# EAGLE board UCirKit30x20-0721 (EAGLE 6.5.0)

Size 73.64 x 100 mm. Coordinates in mm from the lower left corner, seen from the top.
Outline: 0,0 73.64,0 73.64,100 0,100 0,0
Copper layers (1*2*15*16): Top 0.035mm / dielectric 0.2mm / Route2 0.0175mm / dielectric 0.3mm / Route15 0.0175mm / dielectric 0.2mm / Bottom 0.035mm
Design rules "SeeedStudio_4layer_DRU_no_angle_20140221": minimum track width 8mil, minimum drill 12mil, track to track 8mil, track to pad 8mil, pad to pad 8mil, via to via 8mil, smd to smd 0mil, copper to edge 10mil, drill to drill 8mil, minimum pad ring 6mil, minimum via ring 4mil, stop-mask expansion 4mil, vias tented up to drill 100mil, thermal gap 10mil

## Footprints (pad centres in the part's own frame; a part is rotated, then mirrored left to right if it is on the bottom)
1X15 = drill 1.016 pad 1.88: 1 0,0; 2 2.54,0; 3 5.08,0; 4 7.62,0; 5 10.16,0; 6 12.7,0; 7 15.24,0; 8 17.78,0; 9 20.32,0; 10 22.86,0; 11 25.4,0; 12 27.94,0; 13 30.48,0; 14 33.02,0; 15 35.56,0
1X05-1.27MM = drill 0.508 pad 1: 1 0,0; 2 1.27,0; 3 2.54,0; 4 3.81,0; 5 5.08,0

## Placement (x,y rotation side)
JP1  [1X15]  12.7,86.36 270 top
JP2  [1X15]  15.24,86.36 270 top
JP3  [1X15]  17.78,86.36 270 top
JP4  [1X15]  20.32,86.36 270 top
JP5  [1X15]  22.86,86.36 270 top
JP6  [1X15]  25.4,86.36 270 top
JP7  [1X15]  27.94,86.36 270 top
JP8  [1X15]  30.48,86.36 270 top
JP9  [1X15]  33.02,86.36 270 top
JP10  [1X15]  35.56,86.36 270 top
JP11  [1X15]  38.1,86.36 270 top
JP12  [1X15]  40.64,86.36 270 top
JP13  [1X15]  43.18,86.36 270 top
JP14  [1X15]  45.72,86.36 270 top
JP15  [1X15]  48.26,86.36 270 top
JP16  [1X15]  50.8,86.36 270 top
JP17  [1X15]  53.34,86.36 270 top
JP18  [1X15]  55.88,86.36 270 top
JP19  [1X15]  58.42,86.36 270 top
JP20  [1X15]  60.96,86.36 270 top
JP21  [1X15]  12.7,48.26 270 top
JP22  [1X15]  15.24,48.26 270 top
JP23  [1X15]  17.78,48.26 270 top
JP24  [1X15]  20.32,48.26 270 top
JP25  [1X15]  22.86,48.26 270 top
JP26  [1X15]  25.4,48.26 270 top
JP27  [1X15]  27.94,48.26 270 top
JP28  [1X15]  30.48,48.26 270 top
JP29  [1X15]  33.02,48.26 270 top
JP30  [1X15]  35.56,48.26 270 top
JP31  [1X15]  38.1,48.26 270 top
JP32  [1X15]  40.64,48.26 270 top
JP33  [1X15]  43.18,48.26 270 top
JP34  [1X15]  45.72,48.26 270 top
JP35  [1X15]  48.26,48.26 270 top
JP36  [1X15]  50.8,48.26 270 top
JP37  [1X15]  53.34,48.26 270 top
JP38  [1X15]  55.88,48.26 270 top
JP39  [1X15]  58.42,48.26 270 top
JP40  [1X15]  60.96,48.26 270 top
JP42  [1X05-1.27MM]  67.31,17.14 270 top
JP43  [1X05-1.27MM]  56.52,90.81 0 top
JP44  [1X05-1.27MM]  10.16,87 270 top
JP45  [1X05-1.27MM]  10.16,80.64 270 top
JP46  [1X05-1.27MM]  10.16,74.3 270 top
JP47  [1X05-1.27MM]  10.16,67.94 270 top
JP48  [1X05-1.27MM]  10.16,61.59 270 top
JP49  [1X05-1.27MM]  10.16,55.24 270 top
JP50  [1X05-1.27MM]  10.16,48.9 270 top
JP51  [1X05-1.27MM]  10.16,42.55 270 top
JP52  [1X05-1.27MM]  10.16,36.2 270 top
JP53  [1X05-1.27MM]  10.16,29.84 270 top
JP54  [1X05-1.27MM]  10.16,23.5 270 top
JP55  [1X05-1.27MM]  10.16,17.14 270 top
JP56  [1X05-1.27MM]  8.26,87 270 top
JP57  [1X05-1.27MM]  8.26,80.64 270 top
JP58  [1X05-1.27MM]  8.26,74.3 270 top
JP59  [1X05-1.27MM]  8.26,67.94 270 top
JP60  [1X05-1.27MM]  8.26,61.59 270 top
JP61  [1X05-1.27MM]  8.26,55.24 270 top
JP62  [1X05-1.27MM]  8.26,48.9 270 top
JP63  [1X05-1.27MM]  8.26,42.55 270 top
JP64  [1X05-1.27MM]  8.26,36.2 270 top
JP65  [1X05-1.27MM]  8.26,29.84 270 top
JP66  [1X05-1.27MM]  8.26,23.5 270 top
JP67  [1X05-1.27MM]  8.26,17.14 270 top
JP68  [1X05-1.27MM]  6.35,87 270 top
JP69  [1X05-1.27MM]  6.35,80.64 270 top
JP70  [1X05-1.27MM]  6.35,74.3 270 top
JP71  [1X05-1.27MM]  6.35,67.94 270 top
JP72  [1X05-1.27MM]  6.35,61.59 270 top
JP73  [1X05-1.27MM]  6.35,55.24 270 top
JP74  [1X05-1.27MM]  6.35,48.9 270 top
JP75  [1X05-1.27MM]  6.35,42.55 270 top
JP76  [1X05-1.27MM]  6.35,36.2 270 top
JP77  [1X05-1.27MM]  6.35,29.84 270 top
JP78  [1X05-1.27MM]  6.35,23.5 270 top
JP79  [1X05-1.27MM]  6.35,17.14 270 top
JP80  [1X05-1.27MM]  63.5,87 270 top
JP81  [1X05-1.27MM]  63.5,80.64 270 top
JP82  [1X05-1.27MM]  63.5,74.3 270 top
JP83  [1X05-1.27MM]  63.5,67.94 270 top
JP84  [1X05-1.27MM]  63.5,61.59 270 top
JP85  [1X05-1.27MM]  63.5,55.24 270 top
JP86  [1X05-1.27MM]  63.5,48.9 270 top
JP87  [1X05-1.27MM]  63.5,42.55 270 top
JP88  [1X05-1.27MM]  63.5,36.2 270 top
JP89  [1X05-1.27MM]  63.5,29.84 270 top
JP90  [1X05-1.27MM]  63.5,23.5 270 top
JP91  [1X05-1.27MM]  63.5,17.14 270 top
JP92  [1X05-1.27MM]  65.41,17.14 270 top
JP93  [1X05-1.27MM]  65.41,87 270 top
JP94  [1X05-1.27MM]  65.41,80.64 270 top
JP95  [1X05-1.27MM]  65.41,74.3 270 top
JP96  [1X05-1.27MM]  65.41,67.94 270 top
JP97  [1X05-1.27MM]  65.41,61.59 270 top
JP98  [1X05-1.27MM]  65.41,55.24 270 top
JP99  [1X05-1.27MM]  65.41,48.9 270 top
JP100  [1X05-1.27MM]  65.41,42.55 270 top
JP101  [1X05-1.27MM]  65.41,36.2 270 top
JP102  [1X05-1.27MM]  65.41,29.84 270 top
JP103  [1X05-1.27MM]  65.41,23.5 270 top
JP104  [1X05-1.27MM]  67.31,87 270 top
JP105  [1X05-1.27MM]  67.31,80.64 270 top
JP106  [1X05-1.27MM]  67.31,74.3 270 top
JP107  [1X05-1.27MM]  67.31,67.94 270 top
JP108  [1X05-1.27MM]  67.31,61.59 270 top
JP109  [1X05-1.27MM]  67.31,55.24 270 top
JP110  [1X05-1.27MM]  67.31,48.9 270 top
JP111  [1X05-1.27MM]  67.31,42.55 270 top
JP112  [1X05-1.27MM]  67.31,36.2 270 top
JP113  [1X05-1.27MM]  67.31,29.84 270 top
JP114  [1X05-1.27MM]  67.31,23.5 270 top
JP115  [1X05-1.27MM]  31.11,88.9 0 top
JP116  [1X05-1.27MM]  12.06,88.9 0 top
JP117  [1X05-1.27MM]  18.41,88.9 0 top
JP118  [1X05-1.27MM]  24.77,88.9 0 top
JP119  [1X05-1.27MM]  37.47,88.9 0 top
JP120  [1X05-1.27MM]  43.81,88.9 0 top
JP121  [1X05-1.27MM]  50.16,88.9 0 top
JP122  [1X05-1.27MM]  56.52,88.9 0 top
JP123  [1X05-1.27MM]  12.06,90.81 0 top
JP124  [1X05-1.27MM]  18.41,90.81 0 top
JP125  [1X05-1.27MM]  24.77,90.81 0 top
JP126  [1X05-1.27MM]  31.11,90.81 0 top
JP127  [1X05-1.27MM]  37.47,90.81 0 top
JP128  [1X05-1.27MM]  43.81,90.81 0 top
JP129  [1X05-1.27MM]  50.16,90.81 0 top
JP130  [1X05-1.27MM]  12.06,92.71 0 top
JP131  [1X05-1.27MM]  18.41,92.71 0 top
JP132  [1X05-1.27MM]  24.77,92.71 0 top
JP133  [1X05-1.27MM]  31.11,92.71 0 top
JP134  [1X05-1.27MM]  37.47,92.71 0 top
JP135  [1X05-1.27MM]  43.81,92.71 0 top
JP136  [1X05-1.27MM]  50.16,92.71 0 top
JP137  [1X05-1.27MM]  12.06,10.16 0 top
JP138  [1X05-1.27MM]  18.41,10.16 0 top
JP139  [1X05-1.27MM]  56.52,92.71 0 top
JP140  [1X05-1.27MM]  24.77,10.16 0 top
JP141  [1X05-1.27MM]  31.11,10.16 0 top
JP142  [1X05-1.27MM]  37.47,10.16 0 top
JP143  [1X05-1.27MM]  43.81,10.16 0 top
JP144  [1X05-1.27MM]  50.16,10.16 0 top
JP145  [1X05-1.27MM]  56.52,10.16 0 top
JP146  [1X05-1.27MM]  12.06,8.26 0 top
JP147  [1X05-1.27MM]  18.41,8.26 0 top
JP148  [1X05-1.27MM]  24.77,8.26 0 top
JP149  [1X05-1.27MM]  31.11,8.26 0 top
JP150  [1X05-1.27MM]  37.47,8.26 0 top
JP151  [1X05-1.27MM]  43.81,8.26 0 top
JP152  [1X05-1.27MM]  50.16,8.26 0 top
JP153  [1X05-1.27MM]  56.52,8.26 0 top
JP154  [1X05-1.27MM]  12.06,6.35 0 top
JP155  [1X05-1.27MM]  18.41,6.35 0 top
JP156  [1X05-1.27MM]  24.77,6.35 0 top
JP157  [1X05-1.27MM]  31.11,6.35 0 top
JP158  [1X05-1.27MM]  37.47,6.35 0 top
JP159  [1X05-1.27MM]  43.81,6.35 0 top
JP160  [1X05-1.27MM]  50.16,6.35 0 top
JP161  [1X05-1.27MM]  56.52,6.35 0 top

## Library data of the parts
JP1-JP40 JP42-JP161 = SparkFun-Connectors

## Nets
NEW_0: JP1.10 JP42.1
NEW_1: JP1.11 JP42.2
NEW_2: JP1.6 JP42.3
NEW_3: JP1.5 JP42.4
NEW_4: JP1.7 JP42.5
NEW_5: JP6.15 JP80.5
NEW_6: JP11.15 JP85.2
NEW_7: JP1.12 JP113.4
NEW_8: JP12.15 JP83.5
NEW_9: JP1.13 JP113.5
NEW_10: JP2.15 JP88.1
NEW_11: JP3.14 JP88.2
NEW_12: JP1.15 JP88.3
NEW_13: JP2.14 JP88.4
NEW_14: JP3.13 JP88.5
NEW_15: JP7.14 JP87.1
NEW_16: JP7.15 JP87.2
NEW_17: JP8.13 JP87.3
NEW_18: JP8.14 JP87.4
NEW_19: JP3.15 JP87.5
NEW_20: JP8.15 JP86.1
NEW_21: JP9.14 JP86.2
NEW_22: JP9.12 JP86.3
NEW_23: JP9.13 JP86.4
NEW_24: JP10.11 JP86.5
NEW_25: JP1.14 JP91.1
NEW_26: JP2.9 JP91.2
NEW_27: JP2.10 JP91.3
NEW_28: JP2.11 JP91.4
NEW_29: JP2.12 JP91.5
NEW_30: JP2.13 JP90.1
NEW_31: JP3.8 JP90.2
NEW_32: JP3.10 JP90.3
NEW_33: JP3.11 JP90.4
NEW_34: JP3.9 JP90.5
NEW_35: JP4.12 JP89.1
NEW_36: JP4.13 JP89.2
NEW_37: JP4.14 JP89.3
NEW_38: JP4.15 JP89.4
NEW_39: JP5.11 JP89.5
NEW_40: JP9.15 JP94.1
NEW_41: JP10.13 JP94.2
NEW_42: JP12.14 JP94.3
NEW_43: JP13.13 JP94.4
NEW_44: JP13.14 JP94.5
NEW_45: JP10.12 JP93.1
NEW_46: JP10.15 JP93.2
NEW_47: JP10.14 JP93.3
NEW_48: JP11.10 JP93.4
NEW_49: JP11.11 JP93.5
NEW_50: JP3.12 JP92.1
NEW_51: JP4.7 JP92.2
NEW_52: JP4.8 JP92.3
NEW_53: JP1.8 JP92.4
NEW_54: JP1.9 JP92.5
NEW_55: JP14.12 JP97.1
NEW_56: JP14.13 JP97.2
NEW_57: JP14.15 JP97.3
NEW_58: JP14.14 JP97.4
NEW_59: JP15.11 JP97.5
NEW_60: JP15.13 JP96.1
NEW_61: JP15.14 JP96.2
NEW_62: JP15.12 JP96.3
NEW_63: JP15.15 JP96.4
NEW_64: JP16.10 JP96.5
NEW_65: JP16.11 JP95.1
NEW_66: JP16.12 JP95.2
NEW_67: JP16.13 JP95.3
NEW_68: JP16.14 JP95.4
NEW_69: JP16.15 JP95.5
NEW_70: JP11.12 JP100.1
NEW_71: JP11.13 JP100.2
NEW_72: JP12.9 JP100.3
NEW_73: JP5.12 JP100.4
NEW_74: JP5.13 JP100.5
NEW_75: JP11.14 JP99.1
NEW_76: JP12.10 JP99.2
NEW_77: JP12.12 JP99.3
NEW_78: JP12.11 JP99.4
NEW_79: JP12.13 JP99.5
NEW_80: JP17.9 JP98.1
NEW_81: JP17.10 JP98.2
NEW_82: JP17.11 JP98.3
NEW_83: JP13.10 JP98.4
NEW_84: JP13.11 JP98.5
NEW_85: JP4.9 JP103.1
NEW_86: JP4.10 JP103.2
NEW_87: JP4.11 JP103.3
NEW_88: JP5.6 JP103.4
NEW_89: JP5.7 JP103.5
NEW_90: JP5.15 JP102.1
NEW_91: JP5.14 JP102.2
NEW_92: JP6.10 JP102.3
NEW_93: JP5.8 JP102.4
NEW_94: JP5.9 JP102.5
NEW_95: JP6.11 JP101.1
NEW_96: JP6.13 JP101.2
NEW_97: JP6.14 JP101.3
NEW_98: JP6.12 JP101.4
NEW_99: JP7.9 JP101.5
NEW_100: JP17.13 JP106.1
NEW_101: JP17.12 JP106.2
NEW_102: JP17.14 JP106.3
NEW_103: JP17.15 JP106.4
NEW_104: JP18.10 JP106.5
NEW_105: JP13.9 JP105.1
NEW_106: JP18.8 JP105.2
NEW_107: JP18.9 JP105.3
NEW_108: JP18.12 JP105.4
NEW_109: JP18.11 JP105.5
NEW_110: JP13.8 JP104.1
NEW_111: JP13.12 JP104.2
NEW_112: JP14.7 JP104.3
NEW_113: JP14.9 JP104.4
NEW_114: JP14.10 JP104.5
NEW_115: JP18.15 JP109.1
NEW_116: JP14.8 JP109.2
NEW_117: JP14.11 JP109.3
NEW_118: JP15.8 JP109.4
NEW_119: JP15.6 JP109.5
NEW_120: JP18.13 JP108.1
NEW_121: JP18.14 JP108.2
NEW_122: JP19.7 JP108.3
NEW_123: JP19.8 JP108.4
NEW_124: JP19.9 JP108.5
NEW_125: JP19.10 JP107.1
NEW_126: JP19.11 JP107.2
NEW_127: JP19.12 JP107.3
NEW_128: JP19.13 JP107.4
NEW_129: JP19.14 JP107.5
NEW_130: JP7.12 JP112.1
NEW_131: JP7.10 JP112.2
NEW_132: JP7.11 JP112.3
NEW_133: JP7.13 JP112.4
NEW_134: JP8.8 JP112.5
NEW_135: JP15.7 JP111.1
NEW_136: JP8.9 JP111.2
NEW_137: JP8.10 JP111.3
NEW_138: JP8.11 JP111.4
NEW_139: JP8.12 JP111.5
NEW_140: JP15.9 JP110.1
NEW_141: JP15.10 JP110.2
NEW_142: JP16.5 JP110.3
NEW_143: JP16.6 JP110.4
NEW_144: JP16.7 JP110.5
NEW_145: JP5.10 JP114.1
NEW_146: JP6.5 JP114.2
NEW_147: JP6.6 JP114.3
NEW_148: JP6.7 JP114.4
NEW_149: JP6.8 JP114.5
NEW_150: JP9.7 JP113.1
NEW_151: JP9.8 JP113.2
NEW_152: JP6.9 JP113.3
NEW_153: JP16.8 JP80.1
NEW_154: JP16.9 JP80.2
NEW_155: JP17.4 JP80.3
NEW_156: JP17.5 JP80.4
NEW_157: JP17.6 JP81.1
NEW_158: JP17.7 JP81.2
NEW_159: JP17.8 JP81.3
NEW_160: JP18.4 JP81.4
NEW_161: JP19.15 JP81.5
NEW_162: JP20.6 JP82.1
NEW_163: JP20.7 JP82.2
NEW_164: JP20.8 JP82.3
NEW_165: JP20.10 JP82.4
NEW_166: JP20.9 JP82.5
NEW_167: JP20.11 JP83.1
NEW_168: JP20.12 JP83.2
NEW_169: JP20.13 JP83.3
NEW_170: JP20.14 JP83.4
NEW_171: JP21.12 JP84.1
NEW_172: JP21.10 JP84.2
NEW_173: JP20.15 JP84.3
NEW_174: JP21.11 JP84.4
NEW_175: JP21.14 JP84.5
NEW_176: JP21.13 JP85.1
NEW_177: JP22.9 JP85.3
NEW_178: JP22.10 JP85.4
NEW_179: JP18.5 JP85.5
NEW_180: JP2.4 JP46.1
NEW_181: JP2.5 JP46.2
NEW_182: JP2.6 JP46.3
NEW_183: JP2.8 JP46.4
NEW_184: JP2.7 JP46.5
NEW_185: JP45.1
NEW_186: JP1.2 JP45.2
NEW_187: JP1.3 JP45.3
NEW_188: JP1.4 JP45.4
NEW_189: JP2.1 JP45.5
NEW_190: JP2.2 JP44.1
NEW_191: JP3.1 JP44.2
NEW_192: JP2.3 JP44.3
NEW_193: JP3.2 JP44.4
NEW_194: JP4.1 JP44.5
NEW_195: JP7.4 JP49.1
NEW_196: JP7.7 JP49.2
NEW_197: JP7.6 JP49.3
NEW_198: JP7.5 JP49.4
NEW_199: JP7.8 JP49.5
NEW_200: JP8.3 JP48.1
NEW_201: JP8.4 JP48.2
NEW_202: JP8.5 JP48.3
NEW_203: JP8.7 JP48.4
NEW_204: JP8.6 JP48.5
NEW_205: JP3.3 JP47.1
NEW_206: JP3.5 JP47.2
NEW_207: JP3.4 JP47.3
NEW_208: JP3.6 JP47.4
NEW_209: JP3.7 JP47.5
NEW_210: JP9.9 JP52.1
NEW_211: JP18.3 JP52.2
NEW_212: JP18.6 JP52.3
NEW_213: JP18.7 JP52.4
NEW_214: JP19.2 JP52.5
NEW_215: JP9.10 JP51.1
NEW_216: JP9.11 JP51.2
NEW_217: JP10.6 JP51.3
NEW_218: JP10.7 JP51.4
NEW_219: JP10.8 JP51.5
NEW_220: JP10.9 JP50.1
NEW_221: JP10.10 JP50.2
NEW_222: JP11.5 JP50.3
NEW_223: JP11.6 JP50.4
NEW_224: JP11.7 JP50.5
NEW_225: JP21.15 JP55.1
NEW_226: JP22.12 JP55.2
NEW_227: JP22.11 JP55.3
NEW_228: JP22.13 JP55.4
NEW_229: JP22.14 JP55.5
NEW_230: JP19.3 JP54.1
NEW_231: JP23.8 JP54.2
NEW_232: JP23.9 JP54.3
NEW_233: JP22.15 JP54.4
NEW_234: JP23.10 JP54.5
NEW_235: JP19.4 JP53.1
NEW_236: JP19.5 JP53.2
NEW_237: JP19.6 JP53.3
NEW_238: JP20.3 JP53.4
NEW_239: JP20.4 JP53.5
NEW_240: JP9.1 JP58.1
NEW_241: JP4.2 JP58.2
NEW_242: JP4.3 JP58.3
NEW_243: JP4.4 JP58.4
NEW_244: JP4.6 JP58.5
NEW_245: JP6.1 JP57.1
NEW_246: JP7.1 JP57.2
NEW_247: JP8.1 JP57.3
NEW_248: JP7.2 JP57.4
NEW_249: JP8.2 JP57.5
NEW_250: JP7.3 JP56.1
NEW_251: JP5.1 JP56.2
NEW_252: JP5.2 JP56.3
NEW_253: JP6.3 JP56.4
NEW_254: JP6.4 JP56.5
NEW_255: JP9.2 JP61.1
NEW_256: JP9.3 JP61.2
NEW_257: JP9.5 JP61.3
NEW_258: JP9.6 JP61.4
NEW_259: JP9.4 JP61.5
NEW_260: JP4.5 JP60.1
NEW_261: JP5.3 JP60.2
NEW_262: JP10.1 JP60.3
NEW_263: JP10.2 JP60.4
NEW_264: JP10.3 JP60.5
NEW_265: JP5.5 JP59.1
NEW_266: JP5.4 JP59.2
NEW_267: JP6.2 JP59.3
NEW_268: JP37.1 JP59.4
NEW_269: JP36.1 JP59.5
NEW_270: JP11.8 JP64.1
NEW_271: JP11.9 JP64.2
NEW_272: JP20.1 JP64.3
NEW_273: JP20.2 JP64.4
NEW_274: JP21.5 JP64.5
NEW_275: JP12.4 JP63.1
NEW_276: JP12.5 JP63.2
NEW_277: JP12.7 JP63.3
NEW_278: JP12.8 JP63.4
NEW_279: JP12.6 JP63.5
NEW_280: JP10.4 JP62.1
NEW_281: JP10.5 JP62.2
NEW_282: JP13.3 JP62.3
NEW_283: JP13.4 JP62.4
NEW_284: JP13.5 JP62.5
NEW_285: JP23.12 JP67.1
NEW_286: JP23.13 JP67.2
NEW_287: JP23.11 JP67.3
NEW_288: JP23.14 JP67.4
NEW_289: JP23.15 JP67.5
NEW_290: JP20.5 JP66.1
NEW_291: JP21.7 JP66.2
NEW_292: JP24.7 JP66.3
NEW_293: JP24.8 JP66.4
NEW_294: JP24.9 JP66.5
NEW_295: JP21.6 JP65.1
NEW_296: JP21.9 JP65.2
NEW_297: JP21.8 JP65.3
NEW_298: JP22.4 JP65.4
NEW_299: JP22.5 JP65.5
NEW_300: JP40.2 JP70.1
NEW_301: JP39.3 JP70.2
NEW_302: JP38.4 JP70.3
NEW_303: JP40.1 JP70.4
NEW_304: JP39.1 JP70.5
NEW_305: JP40.4 JP69.1
NEW_306: JP39.5 JP69.2
NEW_307: JP38.6 JP69.3
NEW_308: JP40.3 JP69.4
NEW_309: JP39.4 JP69.5
NEW_310: JP40.7 JP68.1
NEW_311: JP39.8 JP68.2
NEW_312: JP38.9 JP68.3
NEW_313: JP40.6 JP68.4
NEW_314: JP40.5 JP68.5
NEW_315: JP11.1 JP73.1
NEW_316: JP11.2 JP73.2
NEW_317: JP11.3 JP73.3
NEW_318: JP11.4 JP73.4
NEW_319: JP12.2 JP73.5
NEW_320: JP35.2 JP72.1
NEW_321: JP34.3 JP72.2
NEW_322: JP35.1 JP72.3
NEW_323: JP12.1 JP72.4
NEW_324: JP13.1 JP72.5
NEW_325: JP38.1 JP71.1
NEW_326: JP37.2 JP71.2
NEW_327: JP36.3 JP71.3
NEW_328: JP36.2 JP71.4
NEW_329: JP35.3 JP71.5
NEW_330: JP13.6 JP74.5
NEW_331: JP22.7 JP77.5
NEW_332: JP12.3 JP74.1
NEW_333: JP13.2 JP74.2
NEW_334: JP14.1 JP74.3
NEW_335: JP14.2 JP74.4
NEW_336: JP14.3 JP75.1
NEW_337: JP13.7 JP75.2
NEW_338: JP14.4 JP75.3
NEW_339: JP14.5 JP75.4
NEW_340: JP14.6 JP75.5
NEW_341: JP15.1 JP76.1
NEW_342: JP15.2 JP76.2
NEW_343: JP15.3 JP76.3
NEW_344: JP15.4 JP76.4
NEW_345: JP22.6 JP76.5
NEW_346: JP23.3 JP77.1
NEW_347: JP22.8 JP77.2
NEW_348: JP23.4 JP77.3
NEW_349: JP23.5 JP77.4
NEW_350: JP23.6 JP78.1
NEW_351: JP23.7 JP78.2
NEW_352: JP24.4 JP78.3
NEW_353: JP24.3 JP78.4
NEW_354: JP24.10 JP78.5
NEW_355: JP24.14 JP79.1
NEW_356: JP24.11 JP79.2
NEW_357: JP24.12 JP79.3
NEW_358: JP24.13 JP79.4
NEW_359: JP25.6 JP79.5
NEW_360: JP15.5 JP43.1
NEW_361: JP16.1 JP43.2
NEW_362: JP16.2 JP43.3
NEW_363: JP16.3 JP43.4
NEW_364: JP16.4 JP43.5
NEW_365: JP34.4 JP115.1
NEW_366: JP33.5 JP115.2
NEW_367: JP34.1 JP115.3
NEW_368: JP33.4 JP115.4
NEW_369: JP34.2 JP115.5
NEW_370: JP39.2 JP118.1
NEW_371: JP38.2 JP118.2
NEW_372: JP35.4 JP118.3
NEW_373: JP34.5 JP118.4
NEW_374: JP33.6 JP118.5
NEW_375: JP38.5 JP117.1
NEW_376: JP37.6 JP117.2
NEW_377: JP37.5 JP117.3
NEW_378: JP36.6 JP117.4
NEW_379: JP35.7 JP117.5
NEW_380: JP39.7 JP116.1
NEW_381: JP39.6 JP116.2
NEW_382: JP37.7 JP116.3
NEW_383: JP36.8 JP116.4
NEW_384: JP35.9 JP116.5
NEW_385: JP17.1 JP121.1
NEW_386: JP17.2 JP121.2
NEW_387: JP17.3 JP121.3
NEW_388: JP18.1 JP121.4
NEW_389: JP18.2 JP121.5
NEW_390: JP37.15 JP120.1
NEW_391: JP21.3 JP120.2
NEW_392: JP22.2 JP120.3
NEW_393: JP19.1 JP120.4
NEW_394: JP38.14 JP120.5
NEW_395: JP36.15 JP119.1
NEW_396: JP38.15 JP119.2
NEW_397: JP39.13 JP119.3
NEW_398: JP21.1 JP119.4
NEW_399: JP21.2 JP119.5
NEW_400: JP34.10 JP124.1
NEW_401: JP36.7 JP124.2
NEW_402: JP35.8 JP124.3
NEW_403: JP34.9 JP124.4
NEW_404: JP34.8 JP124.5
NEW_405: JP37.10 JP123.1
NEW_406: JP38.8 JP123.2
NEW_407: JP38.7 JP123.3
NEW_408: JP37.8 JP123.4
NEW_409: JP33.11 JP123.5
NEW_410: JP21.4 JP122.1
NEW_411: JP22.1 JP122.2
NEW_412: JP22.3 JP122.3
NEW_413: JP23.1 JP122.4
NEW_414: JP23.2 JP122.5
NEW_415: JP33.3 JP127.1
NEW_416: JP32.4 JP127.2
NEW_417: JP37.14 JP127.3
NEW_418: JP38.13 JP127.4
NEW_419: JP35.15 JP127.5
NEW_420: JP32.7 JP126.1
NEW_421: JP33.1 JP126.2
NEW_422: JP32.6 JP126.3
NEW_423: JP32.2 JP126.4
NEW_424: JP33.2 JP126.5
NEW_425: JP33.9 JP125.1
NEW_426: JP38.3 JP125.2
NEW_427: JP37.4 JP125.3
NEW_428: JP37.3 JP125.4
NEW_429: JP32.1 JP125.5
NEW_430: JP36.11 JP130.1
NEW_431: JP35.12 JP130.2
NEW_432: JP34.13 JP130.3
NEW_433: JP37.9 JP130.4
NEW_434: JP36.9 JP130.5
NEW_435: JP24.1 JP129.1
NEW_436: JP32.15 JP129.2
NEW_437: JP33.14 JP129.3
NEW_438: JP33.15 JP129.4
NEW_439: JP34.14 JP129.5
NEW_440: JP34.15 JP128.1
NEW_441: JP35.14 JP128.2
NEW_442: JP39.14 JP128.3
NEW_443: JP35.13 JP128.4
NEW_444: JP39.15 JP128.5
NEW_445: JP31.8 JP133.1
NEW_446: JP31.2 JP133.2
NEW_447: JP30.9 JP133.3
NEW_448: JP31.7 JP133.4
NEW_449: JP31.3 JP133.5
NEW_450: JP32.10 JP132.1
NEW_451: JP31.11 JP132.2
NEW_452: JP30.12 JP132.3
NEW_453: JP36.5 JP132.4
NEW_454: JP36.4 JP132.5
NEW_455: JP32.12 JP131.1
NEW_456: JP31.13 JP131.2
NEW_457: JP30.14 JP131.3
NEW_458: JP33.10 JP131.4
NEW_459: JP32.11 JP131.5
NEW_460: JP36.12 JP136.1
NEW_461: JP40.12 JP136.2
NEW_462: JP40.13 JP136.3
NEW_463: JP36.13 JP136.4
NEW_464: JP36.14 JP136.5
NEW_465: JP40.14 JP135.1
NEW_466: JP37.12 JP135.2
NEW_467: JP38.11 JP135.3
NEW_468: JP40.15 JP135.4
NEW_469: JP37.11 JP135.5
NEW_470: JP32.5 JP134.1
NEW_471: JP32.3 JP134.2
NEW_472: JP31.5 JP134.3
NEW_473: JP39.12 JP134.4
NEW_474: JP40.11 JP134.5
NEW_475: JP37.13 JP139.1
NEW_476: JP38.10 JP139.2
NEW_477: JP38.12 JP139.3
NEW_478: JP39.9 JP139.4
NEW_479: JP39.10 JP139.5
NEW_480: JP40.9 JP161.1
NEW_481: JP40.10 JP161.2
NEW_482: JP30.6 JP161.3
NEW_483: JP31.6 JP161.4
NEW_484: JP31.4 JP161.5
NEW_485: JP24.15 JP138.1
NEW_486: JP25.3 JP138.2
NEW_487: JP24.2 JP138.3
NEW_488: JP25.1 JP138.4
NEW_489: JP24.5 JP138.5
NEW_490: JP24.6 JP137.1
NEW_491: JP25.5 JP137.2
NEW_492: JP25.4 JP137.3
NEW_493: JP25.7 JP137.4
NEW_494: JP25.8 JP137.5
NEW_495: JP39.11 JP142.1
NEW_496: JP40.8 JP142.2
NEW_497: JP30.8 JP142.3
NEW_498: JP30.4 JP142.4
NEW_499: JP29.9 JP142.5
NEW_500: JP25.2 JP141.1
NEW_501: JP25.14 JP141.2
NEW_502: JP25.15 JP141.3
NEW_503: JP26.1 JP141.4
NEW_504: JP29.7 JP141.5
NEW_505: JP25.11 JP140.1
NEW_506: JP25.10 JP140.2
NEW_507: JP26.2 JP140.3
NEW_508: JP25.9 JP140.4
NEW_509: JP26.3 JP140.5
NEW_510: JP29.15 JP145.1
NEW_511: JP27.1 JP145.2
NEW_512: JP35.10 JP145.3
NEW_513: JP34.11 JP145.4
NEW_514: JP36.10 JP145.5
NEW_515: JP29.13 JP144.1
NEW_516: JP29.1 JP144.2
NEW_517: JP31.12 JP144.3
NEW_518: JP30.13 JP144.4
NEW_519: JP29.14 JP144.5
NEW_520: JP30.3 JP143.1
NEW_521: JP29.10 JP143.2
NEW_522: JP35.5 JP143.3
NEW_523: JP35.6 JP143.4
NEW_524: JP34.7 JP143.5
NEW_525: JP25.13 JP148.1
NEW_526: JP26.4 JP148.2
NEW_527: JP26.8 JP148.3
NEW_528: JP26.7 JP148.4
NEW_529: JP25.12 JP147.1
NEW_530: JP27.2 JP148.5
NEW_531: JP26.5 JP147.2
NEW_532: JP26.6 JP147.3
NEW_533: JP26.9 JP147.4
NEW_534: JP26.10 JP147.5
NEW_535: JP26.11 JP146.1
NEW_536: JP26.12 JP146.2
NEW_537: JP26.13 JP146.3
NEW_538: JP26.14 JP146.4
NEW_539: JP26.15 JP146.5
NEW_540: JP29.4 JP151.1
NEW_541: JP34.6 JP151.2
NEW_542: JP33.8 JP151.3
NEW_543: JP28.14 JP151.4
NEW_544: JP28.2 JP151.5
NEW_545: JP30.7 JP150.1
NEW_546: JP29.5 JP150.2
NEW_547: JP28.10 JP150.3
NEW_548: JP28.11 JP150.4
NEW_549: JP28.5 JP150.5
NEW_550: JP27.3 JP149.1
NEW_551: JP27.4 JP149.2
NEW_552: JP27.14 JP149.3
NEW_553: JP28.8 JP149.4
NEW_554: JP30.5 JP149.5
NEW_555: JP27.5 JP154.1
NEW_556: JP27.6 JP154.2
NEW_557: JP27.7 JP154.3
NEW_558: JP27.8 JP154.4
NEW_559: JP27.9 JP154.5
NEW_560: JP35.11 JP153.1
NEW_561: JP33.12 JP153.2
NEW_562: JP34.12 JP153.3
NEW_563: JP29.8 JP153.4
NEW_564: JP29.6 JP153.5
NEW_565: JP27.15 JP152.1
NEW_566: JP28.15 JP152.2
NEW_567: JP28.1 JP152.3
NEW_568: JP32.13 JP152.4
NEW_569: JP31.14 JP152.5
NEW_570: JP28.3 JP157.1
NEW_571: JP28.9 JP157.2
NEW_572: JP28.7 JP157.3
NEW_573: JP27.10 JP157.4
NEW_574: JP28.6 JP157.5
NEW_575: JP27.11 JP156.1
NEW_576: JP27.12 JP156.2
NEW_577: JP30.15 JP156.3
NEW_578: JP31.15 JP156.4
NEW_579: JP27.13 JP156.5
NEW_580: JP28.4 JP155.1
NEW_581: JP32.14 JP155.2
NEW_582: JP33.13 JP155.3
NEW_583: JP32.9 JP155.4
NEW_584: JP33.7 JP155.5
NEW_585: JP32.8 JP160.1
NEW_586: JP31.10 JP160.2
NEW_587: JP31.9 JP160.3
NEW_588: JP30.11 JP160.4
NEW_589: JP31.1 JP160.5
NEW_590: JP30.1 JP159.1
NEW_591: JP29.12 JP159.2
NEW_592: JP30.10 JP159.3
NEW_593: JP29.2 JP159.4
NEW_594: JP30.2 JP159.5
NEW_595: JP28.13 JP158.1
NEW_596: JP29.11 JP158.2
NEW_597: JP29.3 JP158.3
NEW_598: JP28.12 JP158.4
NEW_599: JP1.1 JP158.5

## Tracks (layer width: path | path; a pad name or v marks a point on that pad's centre or on a via)
NEW_0  (1 unrouted)
NEW_1  (1 unrouted)
NEW_2  (1 unrouted)
NEW_3  (1 unrouted)
NEW_4  (1 unrouted)
NEW_5  (1 unrouted)
NEW_6  (1 unrouted)
NEW_7  (1 unrouted)
NEW_8  (1 unrouted)
NEW_9  (1 unrouted)
NEW_10  (1 unrouted)
NEW_11  (1 unrouted)
NEW_12  (1 unrouted)
NEW_13  (1 unrouted)
NEW_14  (1 unrouted)
NEW_15  (1 unrouted)
NEW_16  (1 unrouted)
NEW_17  (1 unrouted)
NEW_18  (1 unrouted)
NEW_19  (1 unrouted)
NEW_20  (1 unrouted)
NEW_21  (1 unrouted)
NEW_22  (1 unrouted)
NEW_23  (1 unrouted)
NEW_24  (1 unrouted)
NEW_25  (1 unrouted)
NEW_26  (1 unrouted)
NEW_27  (1 unrouted)
NEW_28  (1 unrouted)
NEW_29  (1 unrouted)
NEW_30  (1 unrouted)
NEW_31  (1 unrouted)
NEW_32  (1 unrouted)
NEW_33  (1 unrouted)
NEW_34  (1 unrouted)
NEW_35  (1 unrouted)
NEW_36  (1 unrouted)
NEW_37  (1 unrouted)
NEW_38  (1 unrouted)
NEW_39  (1 unrouted)
NEW_40  (1 unrouted)
NEW_41  (1 unrouted)
NEW_42  (1 unrouted)
NEW_43  (1 unrouted)
NEW_44  (1 unrouted)
NEW_45  (1 unrouted)
NEW_46  (1 unrouted)
NEW_47  (1 unrouted)
NEW_48  (1 unrouted)
NEW_49  (1 unrouted)
NEW_50  (1 unrouted)
NEW_51  (1 unrouted)
NEW_52  (1 unrouted)
NEW_53  (1 unrouted)
NEW_54  (1 unrouted)
NEW_55  (1 unrouted)
NEW_56  (1 unrouted)
NEW_57  (1 unrouted)
NEW_58  (1 unrouted)
NEW_59  (1 unrouted)
NEW_60  (1 unrouted)
NEW_61  (1 unrouted)
NEW_62  (1 unrouted)
NEW_63  (1 unrouted)
NEW_64  (1 unrouted)
NEW_65  (1 unrouted)
NEW_66  (1 unrouted)
NEW_67  (1 unrouted)
NEW_68  (1 unrouted)
NEW_69  (1 unrouted)
NEW_70  (1 unrouted)
NEW_71  (1 unrouted)
NEW_72  (1 unrouted)
NEW_73  (1 unrouted)
NEW_74  (1 unrouted)
NEW_75  (1 unrouted)
NEW_76  (1 unrouted)
NEW_77  (1 unrouted)
NEW_78  (1 unrouted)
NEW_79  (1 unrouted)
NEW_80  (1 unrouted)
NEW_81  (1 unrouted)
NEW_82  (1 unrouted)
NEW_83  (1 unrouted)
NEW_84  (1 unrouted)
NEW_85  (1 unrouted)
NEW_86  (1 unrouted)
NEW_87  (1 unrouted)
NEW_88  (1 unrouted)
NEW_89  (1 unrouted)
NEW_90  (1 unrouted)
NEW_91  (1 unrouted)
NEW_92  (1 unrouted)
NEW_93  (1 unrouted)
NEW_94  (1 unrouted)
NEW_95  (1 unrouted)
NEW_96  (1 unrouted)
NEW_97  (1 unrouted)
NEW_98  (1 unrouted)
NEW_99  (1 unrouted)
NEW_100  (1 unrouted)
NEW_101  (1 unrouted)
NEW_102  (1 unrouted)
NEW_103  (1 unrouted)
NEW_104  (1 unrouted)
NEW_105  (1 unrouted)
NEW_106  (1 unrouted)
NEW_107  (1 unrouted)
NEW_108  (1 unrouted)
NEW_109  (1 unrouted)
NEW_110  (1 unrouted)
NEW_111  (1 unrouted)
NEW_112  (1 unrouted)
NEW_113  (1 unrouted)
NEW_114  (1 unrouted)
NEW_115  (1 unrouted)
NEW_116  (1 unrouted)
NEW_117  (1 unrouted)
NEW_118  (1 unrouted)
NEW_119  (1 unrouted)
NEW_120  (1 unrouted)
NEW_121  (1 unrouted)
NEW_122  (1 unrouted)
NEW_123  (1 unrouted)
NEW_124  (1 unrouted)
NEW_125  (1 unrouted)
NEW_126  (1 unrouted)
NEW_127  (1 unrouted)
NEW_128  (1 unrouted)
NEW_129  (1 unrouted)
NEW_130  (1 unrouted)
NEW_131  (1 unrouted)
NEW_132  (1 unrouted)
NEW_133  (1 unrouted)
NEW_134  (1 unrouted)
NEW_135  (1 unrouted)
NEW_136  (1 unrouted)
NEW_137  (1 unrouted)
NEW_138  (1 unrouted)
NEW_139  (1 unrouted)
NEW_140  (1 unrouted)
NEW_141  (1 unrouted)
NEW_142  (1 unrouted)
NEW_143  (1 unrouted)
NEW_144  (1 unrouted)
NEW_145  (1 unrouted)
NEW_146  (1 unrouted)
NEW_147  (1 unrouted)
NEW_148  (1 unrouted)
NEW_149  (1 unrouted)
NEW_150  (1 unrouted)
NEW_151  (1 unrouted)
NEW_152  (1 unrouted)
NEW_153  (1 unrouted)
NEW_154  (1 unrouted)
NEW_155  (1 unrouted)
NEW_156  (1 unrouted)
NEW_157  (1 unrouted)
NEW_158  (1 unrouted)
NEW_159  (1 unrouted)
NEW_160  (1 unrouted)
NEW_161  (1 unrouted)
NEW_162  (1 unrouted)
NEW_163  (1 unrouted)
NEW_164  (1 unrouted)
NEW_165  (1 unrouted)
NEW_166  (1 unrouted)
NEW_167  (1 unrouted)
NEW_168  (1 unrouted)
NEW_169  (1 unrouted)
NEW_170  (1 unrouted)
NEW_171  (1 unrouted)
NEW_172  (1 unrouted)
NEW_173  (1 unrouted)
NEW_174  (1 unrouted)
NEW_175  (1 unrouted)
NEW_176  (1 unrouted)
NEW_177  (1 unrouted)
NEW_178  (1 unrouted)
NEW_179  (1 unrouted)
NEW_180  (1 unrouted)
NEW_181  (1 unrouted)
NEW_182  (1 unrouted)
NEW_183  (1 unrouted)
NEW_184  (1 unrouted)
NEW_186  (1 unrouted)
NEW_187  (1 unrouted)
NEW_188  (1 unrouted)
NEW_189  (1 unrouted)
NEW_190  (1 unrouted)
NEW_191  (1 unrouted)
NEW_192  (1 unrouted)
NEW_193  (1 unrouted)
NEW_194  (1 unrouted)
NEW_195  (1 unrouted)
NEW_196  (1 unrouted)
NEW_197  (1 unrouted)
NEW_198  (1 unrouted)
NEW_199  (1 unrouted)
NEW_200  (1 unrouted)
NEW_201  (1 unrouted)
NEW_202  (1 unrouted)
NEW_203  (1 unrouted)
NEW_204  (1 unrouted)
NEW_205  (1 unrouted)
NEW_206  (1 unrouted)
NEW_207  (1 unrouted)
NEW_208  (1 unrouted)
NEW_209  (1 unrouted)
NEW_210  (1 unrouted)
NEW_211  (1 unrouted)
NEW_212  (1 unrouted)
NEW_213  (1 unrouted)
NEW_214  (1 unrouted)
NEW_215  (1 unrouted)
NEW_216  (1 unrouted)
NEW_217  (1 unrouted)
NEW_218  (1 unrouted)
NEW_219  (1 unrouted)
NEW_220  (1 unrouted)
NEW_221  (1 unrouted)
NEW_222  (1 unrouted)
NEW_223  (1 unrouted)
NEW_224  (1 unrouted)
NEW_225  (1 unrouted)
NEW_226  (1 unrouted)
NEW_227  (1 unrouted)
NEW_228  (1 unrouted)
NEW_229  (1 unrouted)
NEW_230  (1 unrouted)
NEW_231  (1 unrouted)
NEW_232  (1 unrouted)
NEW_233  (1 unrouted)
NEW_234  (1 unrouted)
NEW_235  (1 unrouted)
NEW_236  (1 unrouted)
NEW_237  (1 unrouted)
NEW_238  (1 unrouted)
NEW_239  (1 unrouted)
NEW_240  (1 unrouted)
NEW_241  (1 unrouted)
NEW_242  (1 unrouted)
NEW_243  (1 unrouted)
NEW_244  (1 unrouted)
NEW_245  (1 unrouted)
NEW_246  (1 unrouted)
NEW_247  (1 unrouted)
NEW_248  (1 unrouted)
NEW_249  (1 unrouted)
NEW_250  (1 unrouted)
NEW_251  (1 unrouted)
NEW_252  (1 unrouted)
NEW_253  (1 unrouted)
NEW_254  (1 unrouted)
NEW_255  (1 unrouted)
NEW_256  (1 unrouted)
NEW_257  (1 unrouted)
NEW_258  (1 unrouted)
NEW_259  (1 unrouted)
NEW_260  (1 unrouted)
NEW_261  (1 unrouted)
NEW_262  (1 unrouted)
NEW_263  (1 unrouted)
NEW_264  (1 unrouted)
NEW_265  (1 unrouted)
NEW_266  (1 unrouted)
NEW_267  (1 unrouted)
NEW_268  (1 unrouted)
NEW_269  (1 unrouted)
NEW_270  (1 unrouted)
NEW_271  (1 unrouted)
NEW_272  (1 unrouted)
NEW_273  (1 unrouted)
NEW_274  (1 unrouted)
NEW_275  (1 unrouted)
NEW_276  (1 unrouted)
NEW_277  (1 unrouted)
NEW_278  (1 unrouted)
NEW_279  (1 unrouted)
NEW_280  (1 unrouted)
NEW_281  (1 unrouted)
NEW_282  (1 unrouted)
NEW_283  (1 unrouted)
NEW_284  (1 unrouted)
NEW_285  (1 unrouted)
NEW_286  (1 unrouted)
NEW_287  (1 unrouted)
NEW_288  (1 unrouted)
NEW_289  (1 unrouted)
NEW_290  (1 unrouted)
NEW_291  (1 unrouted)
NEW_292  (1 unrouted)
NEW_293  (1 unrouted)
NEW_294  (1 unrouted)
NEW_295  (1 unrouted)
NEW_296  (1 unrouted)
NEW_297  (1 unrouted)
NEW_298  (1 unrouted)
NEW_299  (1 unrouted)
NEW_300  (1 unrouted)
NEW_301  (1 unrouted)
NEW_302  (1 unrouted)
NEW_303  (1 unrouted)
NEW_304  (1 unrouted)
NEW_305  (1 unrouted)
NEW_306  (1 unrouted)
NEW_307  (1 unrouted)
NEW_308  (1 unrouted)
NEW_309  (1 unrouted)
NEW_310  (1 unrouted)
NEW_311  (1 unrouted)
NEW_312  (1 unrouted)
NEW_313  (1 unrouted)
NEW_314  (1 unrouted)
NEW_315  (1 unrouted)
NEW_316  (1 unrouted)
NEW_317  (1 unrouted)
NEW_318  (1 unrouted)
NEW_319  (1 unrouted)
NEW_320  (1 unrouted)
NEW_321  (1 unrouted)
NEW_322  (1 unrouted)
NEW_323  (1 unrouted)
NEW_324  (1 unrouted)
NEW_325  (1 unrouted)
NEW_326  (1 unrouted)
NEW_327  (1 unrouted)
NEW_328  (1 unrouted)
NEW_329  (1 unrouted)
NEW_330  (1 unrouted)
NEW_331  (1 unrouted)
NEW_332  (1 unrouted)
NEW_333  (1 unrouted)
NEW_334  (1 unrouted)
NEW_335  (1 unrouted)
NEW_336  (1 unrouted)
NEW_337  (1 unrouted)
NEW_338  (1 unrouted)
NEW_339  (1 unrouted)
NEW_340  (1 unrouted)
NEW_341  (1 unrouted)
NEW_342  (1 unrouted)
NEW_343  (1 unrouted)
NEW_344  (1 unrouted)
NEW_345  (1 unrouted)
NEW_346  (1 unrouted)
NEW_347  (1 unrouted)
NEW_348  (1 unrouted)
NEW_349  (1 unrouted)
NEW_350  (1 unrouted)
NEW_351  (1 unrouted)
NEW_352  (1 unrouted)
NEW_353  (1 unrouted)
NEW_354  (1 unrouted)
NEW_355  (1 unrouted)
NEW_356  (1 unrouted)
NEW_357  (1 unrouted)
NEW_358  (1 unrouted)
NEW_359  (1 unrouted)
NEW_360  (1 unrouted)
NEW_361  (1 unrouted)
NEW_362  (1 unrouted)
NEW_363  (1 unrouted)
NEW_364  (1 unrouted)
NEW_365  (1 unrouted)
NEW_366  (1 unrouted)
NEW_367  (1 unrouted)
NEW_368  (1 unrouted)
NEW_369  (1 unrouted)
NEW_370  (1 unrouted)
NEW_371  (1 unrouted)
NEW_372  (1 unrouted)
NEW_373  (1 unrouted)
NEW_374  (1 unrouted)
NEW_375  (1 unrouted)
NEW_376  (1 unrouted)
NEW_377  (1 unrouted)
NEW_378  (1 unrouted)
NEW_379  (1 unrouted)
NEW_380  (1 unrouted)
NEW_381  (1 unrouted)
NEW_382  (1 unrouted)
NEW_383  (1 unrouted)
NEW_384  (1 unrouted)
NEW_385  (1 unrouted)
NEW_386  (1 unrouted)
NEW_387  (1 unrouted)
NEW_388  (1 unrouted)
NEW_389  (1 unrouted)
NEW_390  (1 unrouted)
NEW_391  (1 unrouted)
NEW_392  (1 unrouted)
NEW_393  (1 unrouted)
NEW_394  (1 unrouted)
NEW_395  (1 unrouted)
NEW_396  (1 unrouted)
NEW_397  (1 unrouted)
NEW_398  (1 unrouted)
NEW_399  (1 unrouted)
NEW_400  (1 unrouted)
NEW_401  (1 unrouted)
NEW_402  (1 unrouted)
NEW_403  (1 unrouted)
NEW_404  (1 unrouted)
NEW_405  (1 unrouted)
NEW_406  (1 unrouted)
NEW_407  (1 unrouted)
NEW_408  (1 unrouted)
NEW_409  (1 unrouted)
NEW_410  (1 unrouted)
NEW_411  (1 unrouted)
NEW_412  (1 unrouted)
NEW_413  (1 unrouted)
NEW_414  (1 unrouted)
NEW_415  (1 unrouted)
NEW_416  (1 unrouted)
NEW_417  (1 unrouted)
NEW_418  (1 unrouted)
NEW_419  (1 unrouted)
NEW_420  (1 unrouted)
NEW_421  (1 unrouted)
NEW_422  (1 unrouted)
NEW_423  (1 unrouted)
NEW_424  (1 unrouted)
NEW_425  (1 unrouted)
NEW_426  (1 unrouted)
NEW_427  (1 unrouted)
NEW_428  (1 unrouted)
NEW_429  (1 unrouted)
NEW_430  (1 unrouted)
NEW_431  (1 unrouted)
NEW_432  (1 unrouted)
NEW_433  (1 unrouted)
NEW_434  (1 unrouted)
NEW_435  (1 unrouted)
NEW_436  (1 unrouted)
NEW_437  (1 unrouted)
NEW_438  (1 unrouted)
NEW_439  (1 unrouted)
NEW_440  (1 unrouted)
NEW_441  (1 unrouted)
NEW_442  (1 unrouted)
NEW_443  (1 unrouted)
NEW_444  (1 unrouted)
NEW_445  (1 unrouted)
NEW_446  (1 unrouted)
NEW_447  (1 unrouted)
NEW_448  (1 unrouted)
NEW_449  (1 unrouted)
NEW_450  (1 unrouted)
NEW_451  (1 unrouted)
NEW_452  (1 unrouted)
NEW_453  (1 unrouted)
NEW_454  (1 unrouted)
NEW_455  (1 unrouted)
NEW_456  (1 unrouted)
NEW_457  (1 unrouted)
NEW_458  (1 unrouted)
NEW_459  (1 unrouted)
NEW_460  (1 unrouted)
NEW_461  (1 unrouted)
NEW_462  (1 unrouted)
NEW_463  (1 unrouted)
NEW_464  (1 unrouted)
NEW_465  (1 unrouted)
NEW_466  (1 unrouted)
NEW_467  (1 unrouted)
NEW_468  (1 unrouted)
NEW_469  (1 unrouted)
NEW_470  (1 unrouted)
NEW_471  (1 unrouted)
NEW_472  (1 unrouted)
NEW_473  (1 unrouted)
NEW_474  (1 unrouted)
NEW_475  (1 unrouted)
NEW_476  (1 unrouted)
NEW_477  (1 unrouted)
NEW_478  (1 unrouted)
NEW_479  (1 unrouted)
NEW_480  (1 unrouted)
NEW_481  (1 unrouted)
NEW_482  (1 unrouted)
NEW_483  (1 unrouted)
NEW_484  (1 unrouted)
NEW_485  (1 unrouted)
NEW_486  (1 unrouted)
NEW_487  (1 unrouted)
NEW_488  (1 unrouted)
NEW_489  (1 unrouted)
NEW_490  (1 unrouted)
NEW_491  (1 unrouted)
NEW_492  (1 unrouted)
NEW_493  (1 unrouted)
NEW_494  (1 unrouted)
NEW_495  (1 unrouted)
NEW_496  (1 unrouted)
NEW_497  (1 unrouted)
NEW_498  (1 unrouted)
NEW_499  (1 unrouted)
NEW_500  (1 unrouted)
NEW_501  (1 unrouted)
NEW_502  (1 unrouted)
NEW_503  (1 unrouted)
NEW_504  (1 unrouted)
NEW_505  (1 unrouted)
NEW_506  (1 unrouted)
NEW_507  (1 unrouted)
NEW_508  (1 unrouted)
NEW_509  (1 unrouted)
NEW_510  (1 unrouted)
NEW_511  (1 unrouted)
NEW_512  (1 unrouted)
NEW_513  (1 unrouted)
NEW_514  (1 unrouted)
NEW_515  (1 unrouted)
NEW_516  (1 unrouted)
NEW_517  (1 unrouted)
NEW_518  (1 unrouted)
NEW_519  (1 unrouted)
NEW_520  (1 unrouted)
NEW_521  (1 unrouted)
NEW_522  (1 unrouted)
NEW_523  (1 unrouted)
NEW_524  (1 unrouted)
NEW_525  (1 unrouted)
NEW_526  (1 unrouted)
NEW_527  (1 unrouted)
NEW_528  (1 unrouted)
NEW_529  (1 unrouted)
NEW_530  (1 unrouted)
NEW_531  (1 unrouted)
NEW_532  (1 unrouted)
NEW_533  (1 unrouted)
NEW_534  (1 unrouted)
NEW_535  (1 unrouted)
NEW_536  (1 unrouted)
NEW_537  (1 unrouted)
NEW_538  (1 unrouted)
NEW_539  (1 unrouted)
NEW_540  (1 unrouted)
NEW_541  (1 unrouted)
NEW_542  (1 unrouted)
NEW_543  (1 unrouted)
NEW_544  (1 unrouted)
NEW_545  (1 unrouted)
NEW_546  (1 unrouted)
NEW_547  (1 unrouted)
NEW_548  (1 unrouted)
NEW_549  (1 unrouted)
NEW_550  (1 unrouted)
NEW_551  (1 unrouted)
NEW_552  (1 unrouted)
NEW_553  (1 unrouted)
NEW_554  (1 unrouted)
NEW_555  (1 unrouted)
NEW_556  (1 unrouted)
NEW_557  (1 unrouted)
NEW_558  (1 unrouted)
NEW_559  (1 unrouted)
NEW_560  (1 unrouted)
NEW_561  (1 unrouted)
NEW_562  (1 unrouted)
NEW_563  (1 unrouted)
NEW_564  (1 unrouted)
NEW_565  (1 unrouted)
NEW_566  (1 unrouted)
NEW_567  (1 unrouted)
NEW_568  (1 unrouted)
NEW_569  (1 unrouted)
NEW_570  (1 unrouted)
NEW_571  (1 unrouted)
NEW_572  (1 unrouted)
NEW_573  (1 unrouted)
NEW_574  (1 unrouted)
NEW_575  (1 unrouted)
NEW_576  (1 unrouted)
NEW_577  (1 unrouted)
NEW_578  (1 unrouted)
NEW_579  (1 unrouted)
NEW_580  (1 unrouted)
NEW_581  (1 unrouted)
NEW_582  (1 unrouted)
NEW_583  (1 unrouted)
NEW_584  (1 unrouted)
NEW_585  (1 unrouted)
NEW_586  (1 unrouted)
NEW_587  (1 unrouted)
NEW_588  (1 unrouted)
NEW_589  (1 unrouted)
NEW_590  (1 unrouted)
NEW_591  (1 unrouted)
NEW_592  (1 unrouted)
NEW_593  (1 unrouted)
NEW_594  (1 unrouted)
NEW_595  (1 unrouted)
NEW_596  (1 unrouted)
NEW_597  (1 unrouted)
NEW_598  (1 unrouted)
NEW_599  (1 unrouted)